# Altium PCB nanoboard.PcbDoc
Units mil, origin at the board's own origin, x right, y up, seen from the top; angles counter-clockwise.
Board outline 1325 x 1375 mil, 2 copper layers (Top Layer, Bottom Layer); 12 components, 35 nets, 74 pads, 2 vias.
Unrouted connection lines stored in the file: 35.
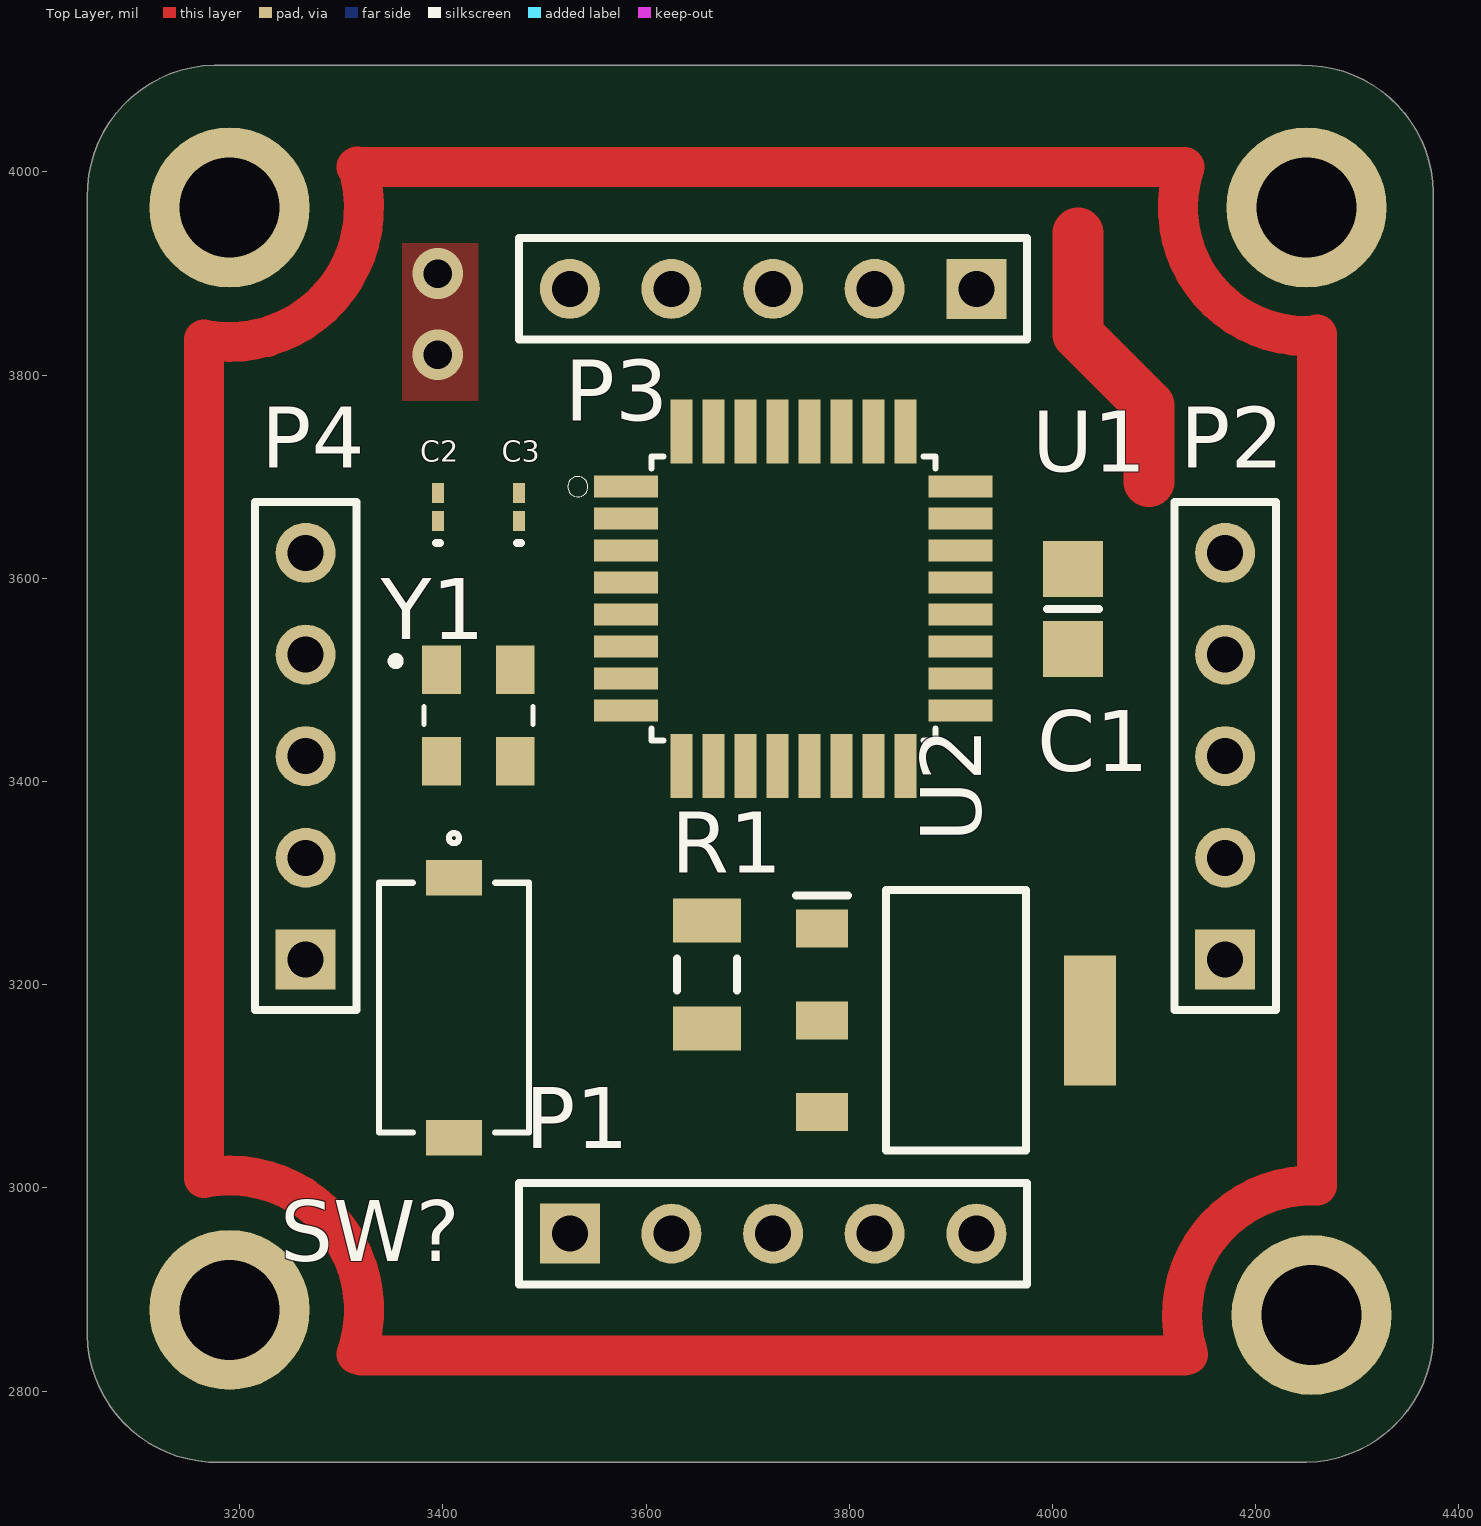
[diagram p0: Top Layer view]
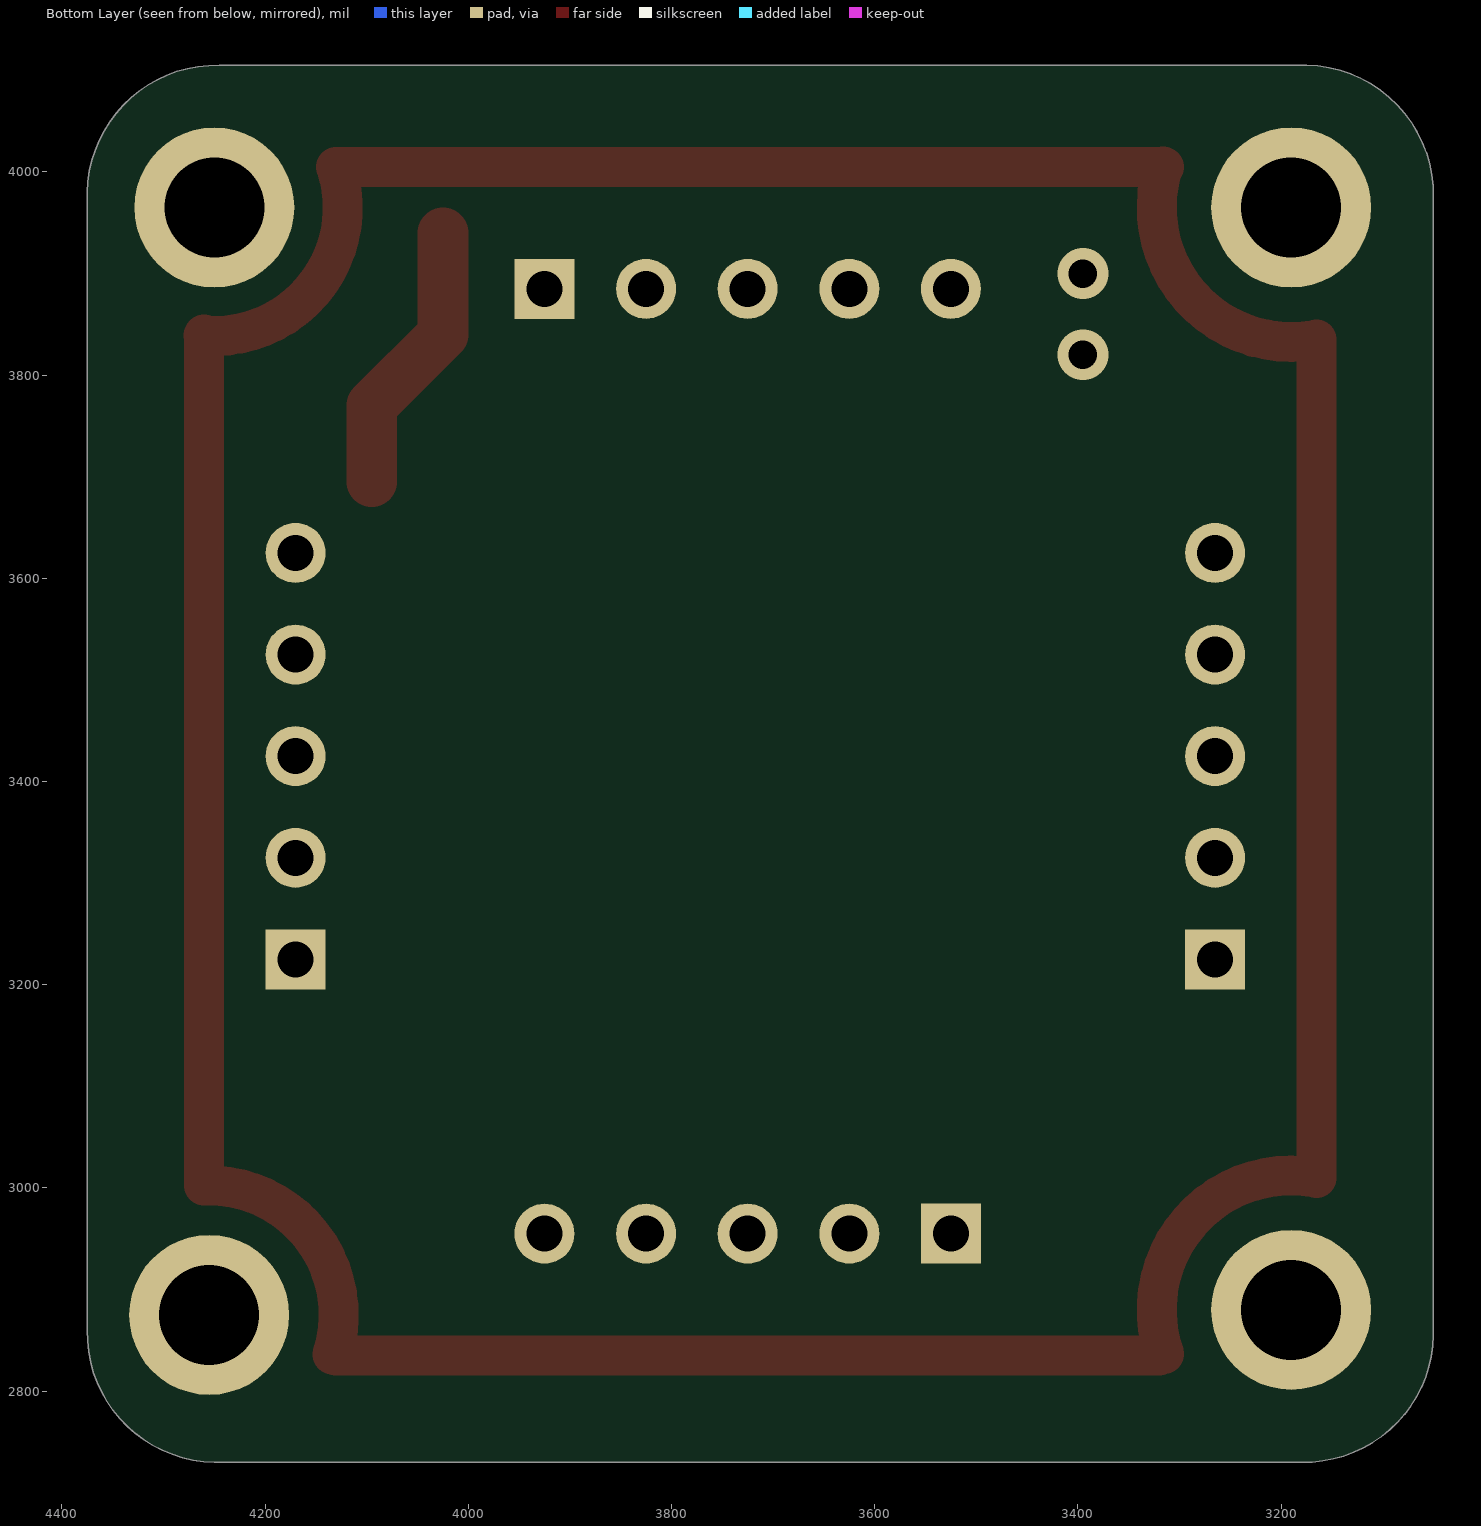
[diagram p1: Bottom Layer view, seen from below]

## Layer stack, top to bottom
Top Solder: solder mask 0.4, Solder Resist, Dk 3.5
Top Layer: signal copper 1.4
Dielectric 1: dielectric 12.6, FR-4, Dk 4.8
Bottom Layer: signal copper 1.4
Bottom Solder: solder mask 0.4, Solder Resist, Dk 3.5

## Board outline
3050,2855 3050,3975 cw(c3177.5,3977.5) 3175,4105 4245,4105 cw(c4247.5,3977.5) 4375,3980 4375,2860 cw(c4247.5,2857.5) 4250,2730 3180,2730 cw(c3177.5,2857.5)

## Design rules (kind name [scope] priority, off if disabled: settings)
Clearance [All] p1: gap=10 ignorepadtopadclearanceinfootprint=FALSE except(0: Arc-Hole Track-Hole SMDPad-Hole THPad-Hole Via-Hole Fill-Hole Poly-Hole Region-Hole Text-Hole; 3.94: Arc-SMDPad Track-SMDPad SMDPad-SMDPad)
PolygonConnect [All] p1: connectstyle=Relief reliefconductorwidth=10 reliefentries=4 polygonreliefangle="90 Angle" airgapwidth=10
RoomDefinition nanoboard [InComponentClass('nanoboard')] p1: confinementstyle=ConfineIn formatcopy=TRUE lockcomponents=FALSE outline 3095,2785 4345,2785 4345,4060 3095,4060
RoutingVias [All] p1: holewidth=28 width=50 viastyle="Through Hole" minholewidth=28 minwidth=50 maxholewidth=28 maxwidth=50
SolderMaskExpansion [All] p1: expansion=4 istentingtop=FALSE
Width Width_1 [All] p1: maxlimit=118.11 minlimit=6.06 preferedwidth=17.87 bottomlayer_minwidth=10 bottomlayer_prefwidth=10 minimp=50.000000 maximp=50.000000 favimp=50.000000
30 further rules are at their usual default settings.

## Components (designator, comment, footprint, x,y, rotation, side; value= is the part's Value field where it differs from the comment)
C1 "Cap" 6-0805_M 4020,3570 r270 top value=100nF
C2 "Cap" 0603 3395,3670 r90 top value=15pF
C3 "Cap" 0603 3475,3670 r90 top value=15pF
P1 "Header 5" HDR1X5 3525,2955 r0 top
P2 "Header 5" HDR1X5 4170,3225 r90 top
P3 "Header 5" HDR1X5 3925,3885 r180 top
P4 "Header 5" HDR1X5 3265,3225 r90 top
R1 "Res1" C1206 3660,3210 r90 top value=1K
SW? "" SW_PTS636_CNK 3410.95,3177.4 r270 top
U1 "ATMEGA328-AU" QFP80P900X900X120-32N 3745,3580 r0 top
U2 "AMS1117" SOT229P700X180-4N 3905,3165 r0 top
Y1 "16MHz" OSCCC320X250X60N 3435,3465 r0 top

## Footprints (in the part's own frame and the unit in brackets; to place one, negate y for a bottom-side part, rotate by r counter-clockwise, add the part's x,y. Pads: shape width x height; smd on the part's side, far side on the other; paste and mask are expansions set on the pad)
6-0805_M [mm] "Chip Resistor, Body 2.0x1.2mm, IPC Low Density"
  rect 1.4x1.5 smd: 1(-1,0) 2(1,0)
  silkscreen extent 0,-0.65 0,0.65, body extent -1.07,-0.7 1.07,0.7, height 0.7
0603 [mm] "Chip Inductor, Body 0.6x0.3mm, IPC High Density"
  rect 0.5x0.3 smd: 1(-0.35,0) 2(0.35,0)
  silkscreen extent -0.9,-0.05 -0.9,0.05, body extent -0.33,-0.18 0.33,0.18, height 0.55
C1206 [mm] "Chip Capacitor, Body 3.2x1.6mm, IPC High Density"
  rect 1.1x1.7 smd: 1(-1.35,0) 2(1.35,0)
  silkscreen extent -0.4,-0.75 0.4,0.75, body extent -1.7,-0.9 1.7,0.9, height 1.3
HDR1X5 [mm] "Connector; Header; 5 Position"
  rect 1.5x1.5 hole 0.9: 1(0,0)
  round 1.5 hole 0.9: 2(2.54,0) 3(5.08,0) 4(7.62,0) 5(10.16,0)
  silkscreen extent -1.27,-1.27 11.43,1.27
OSCCC320X250X60N [mm]
  rect 0.97x1.22 smd: 1(-0.92,1.145) 2(-0.92,-1.145) 3(0.92,-1.145) 4(0.92,1.145)
  silkscreen extent -2.17,-0.22 1.36,1.46
QFP80P900X900X120-32N [mm]
  rect 1.6x0.55 smd: 1(-4.18,2.8) 2(-4.18,2) 3(-4.18,1.2) 4(-4.18,0.4) 5(-4.18,-0.4) 6(-4.18,-1.2) 7(-4.18,-2) 8(-4.18,-2.8) 17(4.18,-2.8) 18(4.18,-2) 19(4.18,-1.2) 20(4.18,-0.4) 21(4.18,0.4) 22(4.18,1.2) 23(4.18,2) 24(4.18,2.8)
  rect 0.55x1.6 smd: 9(-2.8,-4.18) 10(-2,-4.18) 11(-1.2,-4.18) 12(-0.4,-4.18) 13(0.4,-4.18) 14(1.2,-4.18) 15(2,-4.18) 16(2.8,-4.18) 25(2.8,4.18) 26(2,4.18) 27(1.2,4.18) 28(0.4,4.18) 29(-0.4,4.18) 30(-1.2,4.18) 31(-2,4.18) 32(-2.8,4.18)
  silkscreen extent -5.64,-3.55 3.55,3.55, body extent -4.5,-4.5 4.5,4.5, height 1.2
SOT229P700X180-4N [mm]
  rect 1.3x0.95 smd: 1(-3.35,2.29) 2(-3.35,0) 3(-3.35,-2.29)
  rect 1.3x3.25 smd: 4(3.35,0)
  silkscreen extent -4,-3.25 1.75,3.25
SW_PTS636_CNK [mil]
  rect 35x55 smd paste+0 mask+0: 1(-127.95,0) 2(127.95,0)
  silkscreen extent -172,-74 123,74, body extent -118,-69 118,69, height 169

## Part data
C1 C2 C3: "Capacitor", LatestRevisionDate=17-Jul-2002, LatestRevisionNote="Re-released for DXP Platform.", PackageDescription="Radial Cap, Thru-Hole; 2 Leads; 0.3 in Pin Spacing", PackageReference=RAD-0.3, Published=8-Jun-2000, Publisher="Altium Limited"
P1 P2 P3 P4: "Header, 5-Pin", LatestRevisionDate=17-Jul-2002, LatestRevisionNote="Re-released for DXP Platform.", Publisher="Altium Limited"
R1: "Resistor", LatestRevisionDate=17-Jul-2002, LatestRevisionNote="Re-released for DXP Platform.", PackageDescription="Axial Device, Thru-Hole; 2 Leads; 0.3 in Pin Spacing", PackageReference=AXIAL-0.3, Published=8-Jun-2000, Publisher="Altium Limited"
SW?: library part "PTS636 SM50J SMTR LFS", "No Description Available", Mfr_Name="C&K Components", Type="Tactile Switches"
U1: "No Description Available", Mfr_Name=Microchip, RefDes=RefDes, Type=Type
U2: "1117", Manufacturer_Name="Advanced Monolithic Systems", Datasheet Link=https://datasheet.lcsc.com/szlcsc/Advanced-Monolithic-Systems-AMS-AMS1117-ADJ_C6188.pdf, Geometry.Height=1.8mm, Manufacturer_Part_Number=AMS1117
Y1: library part CX3225SB16000D0GZJC1, "Crystal 25.0000mhz 8pf Smd", Package=None, Availability=Unavailable, MP=CX3225SB16000D0GZJC1, Price=None

## Free pads (board coordinates)
  round 157.48 hole 98.43: H1(3190,3965) H2(4250,3965) H3(4255,2875) H4(3190,2880)

## Via types
v1: diameter 50, hole 28, Top Layer to Bottom Layer, 2 vias

## Nets (pads, with @x,y where several pads share a name; then routed paths per layer and width w, separated by ;. In a path a pad name is that pad's centre, name@x,y a point inside that pad or via, vN(x,y) a via of type N, cw(c..) or ccw(c..) an arc to the next point about the centre after c; other vN are vias at no path point)
ADC6: U1.19
ADC7: U1.22
AREF: C1.2 U1.20
GND: C1.1 C2.1 C3.1 SW?.2 U1.3 U1.5 U1.21 U2.1
  other v1: 3395,3820 3395,3900
NetLabel41: P3.5
NetLabel42: P4.1
NetLabel43: P4.2
NetLabel44: P4.3
NetLabel45: P4.4
NetLabel46: P4.5
NetR1_2: R1.2 U1.29
NetY1_2: Y1.2 Y1.4
PB0: P1.1 U1.12
PB1: P1.2 U1.13
PB2: P1.3 U1.14
PB3: P1.4 U1.15
PB4: P1.5 U1.16
PB5: P2.1 U1.17
PB6: C2.2 U1.7 Y1.1
PB7: C3.2 U1.8 Y1.3
PC0: U1.23
PC1: U1.24
PC2: U1.25
PC3: U1.26
PC4: U1.27
PC5: U1.28
PD0: P2.2 U1.30
PD1: P2.3 U1.31
PD2: P2.4 U1.32
PD3: P2.5 U1.1
PD4: P3.1 U1.2
PD5: P3.2 U1.9
PD6: P3.3 U1.10
PD7: P3.4 U1.11
VCC: R1.1 SW?.1 U1.4 U1.6 U1.18 U2.2 U2.4
pads on no net: U2.3
copper on no net: | length 4607.7
  Top Layer w39.37: 3315,4005 4130,4005 ccw(c4250,3965) 4260.39,3838.94 ; 3315.1,2836.7 ccw(c3190,2880) 3165,3010 3165,3835 ccw(c3190,3965) 3316.08,4005.35 ; 3320,2835 4130,2835 ; 4133.59,2836.15 cw(c4255,2875) 4260.31,3002.36 4260.31,3839.94
  Top Layer w50: 4025,3940 4025,3840 4095,3770 4095,3695

## Polygon pours and split planes (outlines as drawn)
GND on Top Layer "GND_L01_P000" (solid, pour order 0): 3360,3930 3435,3930 3435,3775 3360,3775

## Silkscreen, mask and mechanical layers (free items; w line width, h text height)
Top Solder:
  lines w17.72: 3165,3010 3165,3830 ; 3317.78,4005.89 4131.81,4005 ; 3320,2835 4134.07,2835 ; 4260,3005 4260,3840
  lines w17.87: 3164.86,3010.74 cw(c3190,2880) 3315.81,2836.45 ; 3165.57,3833.08 ccw(c3190,3965) 3317.78,4005.89 ; 4131.81,4005.7 ccw(c4250,3965) 4258.72,3840.3 ; 4134.07,2834.69 cw(c4255,2875) 4259.9,3002.38
Mechanical 1:
  the board outline again, w10